# Altium PCB mini.PcbDoc
Units mm, origin at the board's own origin, x right, y up, seen from the top; angles counter-clockwise.
Board outline 35 x 32 mm, 2 copper layers (Top Layer, Bottom Layer); 32 components, 38 nets, 165 pads, 42 vias.
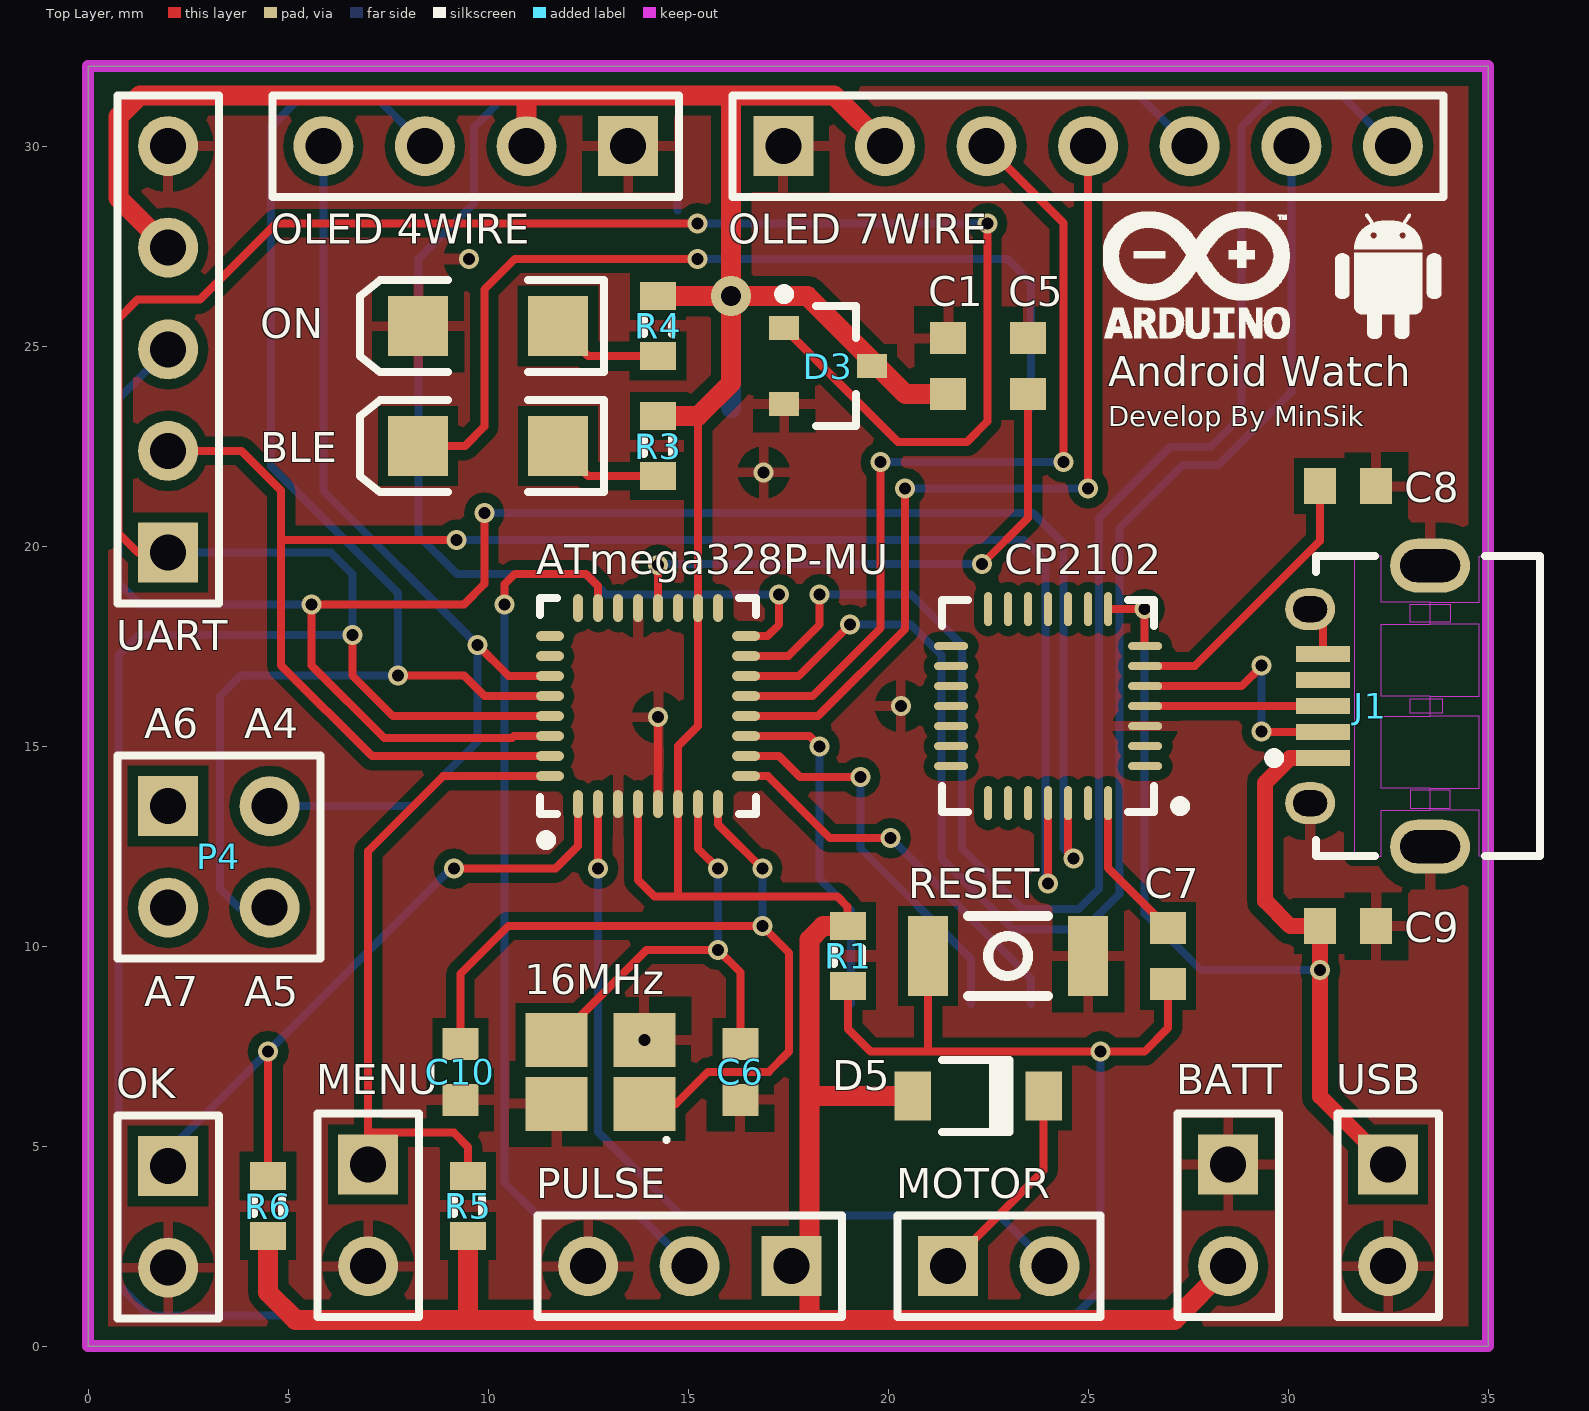
[diagram p0: Top Layer view]
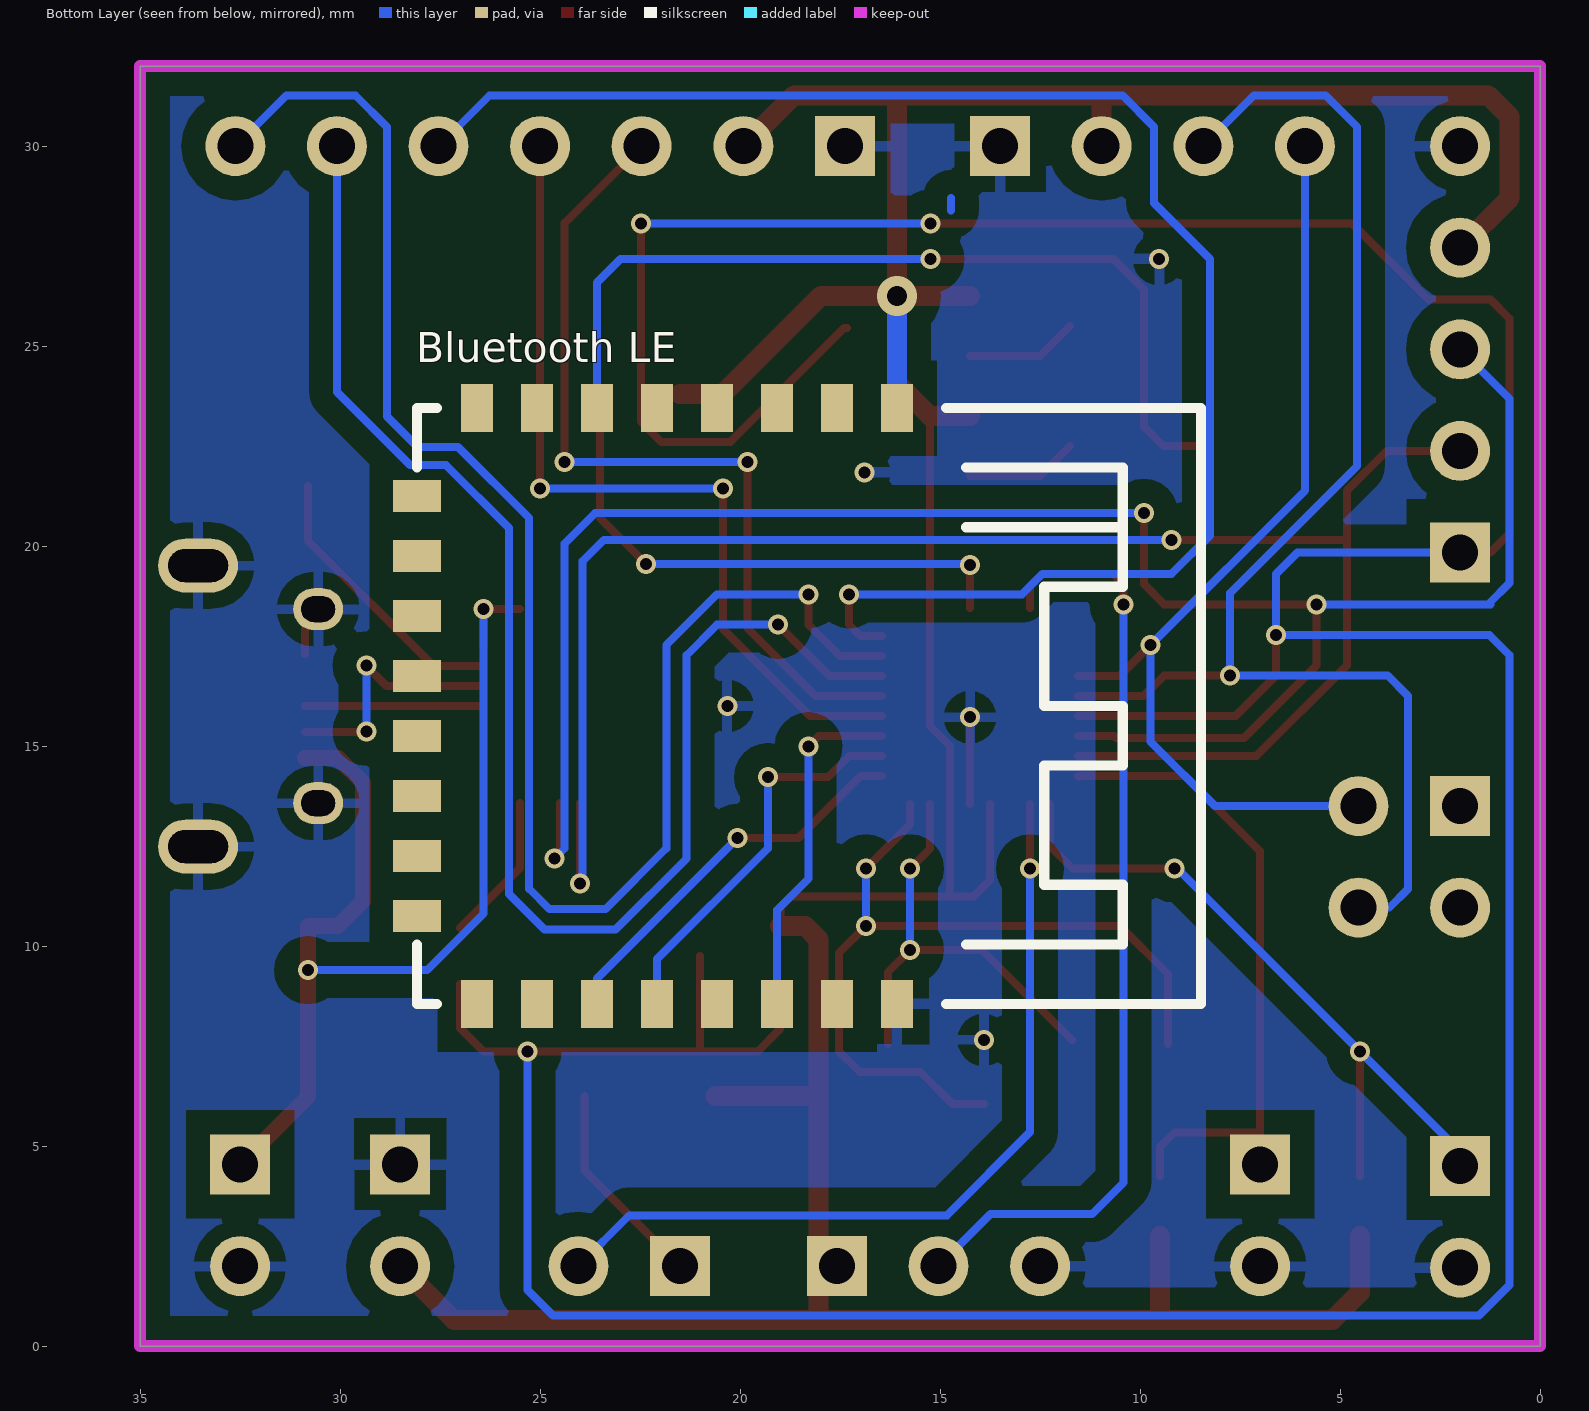
[diagram p1: Bottom Layer view, seen from below]

## Layer stack, top to bottom
Top Solder: solder mask 0.0102, Solder Resist, Dk 3.5
Top Layer: signal copper 0.0356
Dielectric 1: dielectric 0.32, FR-4, Dk 4.8
Bottom Layer: signal copper 0.0356
Bottom Solder: solder mask 0.0102, Solder Resist, Dk 3.5

## Board outline
0,0 35,0 35,32 0,32

## Design rules (kind name [scope] priority, off if disabled: settings)
AssemblyTestPointUsage [All] p1 off:
AssemblyTestpoint [All] p1 off: testpointundercomponent=TRUE minsize=1.016 maxsize=2.54 preferedsize=1.524 minholesize=0 maxholesize=1.016 preferedholesize=0.813 testpointgrid=0.025 usegrid=TRUE gridtolerance=0 allowsidetop=TRUE allowsidebottom=TRUE
Clearance Clearance_5 [InNamedPolygon('Top Layer-GND')] p1: gap=0.254 ignorepadtopadclearanceinfootprint=FALSE except(0: Arc-Hole Track-Hole SMDPad-Hole THPad-Hole Via-Hole Fill-Hole Poly-Hole Region-Hole Text-Hole)
Clearance Clearance_4 [InNamedPolygon('Top Layer-GND')] p2: gap=0.254 ignorepadtopadclearanceinfootprint=FALSE except(0: Arc-Hole Track-Hole SMDPad-Hole THPad-Hole Via-Hole Fill-Hole Poly-Hole Region-Hole Text-Hole)
Clearance Clearance_3 [InNamedPolygon('Bottom Layer-GND')] p3: gap=0.6 ignorepadtopadclearanceinfootprint=FALSE
Clearance Clearance_2 [InNamedPolygon('Top Layer-GND')] p4: gap=0.254 ignorepadtopadclearanceinfootprint=FALSE except(0: Arc-Hole Track-Hole SMDPad-Hole THPad-Hole Via-Hole Fill-Hole Poly-Hole Region-Hole Text-Hole)
Clearance Clearance_1 [InNamedPolygon('Top Layer-GND')] p5: gap=0.254 ignorepadtopadclearanceinfootprint=FALSE
Clearance [All] p6: gap=0.1 ignorepadtopadclearanceinfootprint=FALSE
FabricationTestPointUsage [All] p1 off: valid=0 allowmultiple=FALSE
FabricationTestpoint [All] p1 off: side=3 testpointundercomponent=TRUE minsize=1.016 maxsize=2.54 preferedsize=1.524 minholesize=0 maxholesize=1.016 preferedholesize=0.813 testpointgrid=0.025 allowsidetop=TRUE allowsidebottom=TRUE usegrid=TRUE gridtolerance=0
HoleSize [All] p1: absolutevalues=TRUE maxlimit=2.54 minlimit=0 maxpercent=80.000 minpercent=20.000
MinimumSolderMaskSliver [All] p1: minsoldermaskwidth=0.1
PolygonConnect PolygonConnect_5 [All vs IsNamedPolygon('Top Layer-GND')] p1: connectstyle=Relief reliefconductorwidth=0.254 reliefentries=4 polygonreliefangle="90 Angle" airgapwidth=0.4
PolygonConnect PolygonConnect_4 [All vs IsNamedPolygon('Top Layer-GND')] p2: connectstyle=Relief reliefconductorwidth=0.254 reliefentries=4 polygonreliefangle="90 Angle" airgapwidth=0.4
PolygonConnect PolygonConnect_3 [All vs IsNamedPolygon('Bottom Layer-GND')] p3: connectstyle=Relief reliefconductorwidth=0.254 reliefentries=4 polygonreliefangle="90 Angle" airgapwidth=0.4
PolygonConnect PolygonConnect_2 [All vs IsNamedPolygon('Top Layer-GND')] p4: connectstyle=Relief reliefconductorwidth=0.254 reliefentries=4 polygonreliefangle="90 Angle" airgapwidth=0.4
PolygonConnect PolygonConnect_1 [All vs IsNamedPolygon('Bottom Layer-GND')] p5: thpad.connectstyle=Relief thpad.reliefconductorwidth=0.254 thpad.reliefentries=4 thpad.polygonreliefangle="90 Angle" thpad.airgapwidth=0.4 smdpad.connectstyle=Relief smdpad.reliefconductorwidth=0.254 smdpad.reliefentries=4 smdpad.polygonreliefangle="90 Angle" smdpad.airgapwidth=0.4 via.connectstyle=Relief via.reliefconductorwidth=0.254 via.reliefentries=4 via.polygonreliefangle="90 Angle" via.airgapwidth=0.254
PolygonConnect [All] p6: connectstyle=Relief reliefconductorwidth=0.254 reliefentries=4 polygonreliefangle="90 Angle" airgapwidth=0.254
RoutingVias [All] p1: holewidth=0.3 width=0.5 viastyle="Through Hole" minholewidth=0.3 minwidth=0.5 maxholewidth=0.5 maxwidth=1
SilkToSolderMaskClearance [IsPad] p1: minsilkscreentomaskgap=0.1 clearancetoexposedcopper=TRUE
SolderMaskExpansion SolderMaskExpansion_ATmega328P-MU [HasFootprint('32M1-A_L')] p1: expansion=0.07
SolderMaskExpansion SolderMaskExpansion_HIRO [HasFootprint('HIRO-ZX62D-B-5P8_V')] p2: expansion=0.07
SolderMaskExpansion SolderMaskExpansion_TSX-3225 [HasFootprint('TSX-3225')] p3: expansion=0.07
SolderMaskExpansion SolderMaskExpansion_CP2102 [HasFootprint('SLAB-QFN-28-3125x3125TP_N')] p4: expansion=0.07
SolderMaskExpansion [All] p5: expansion=0.102
Width Width_5V [InNet('5V')] p1: maxlimit=1 minlimit=0.1 preferedwidth=0.5
Width Width_VBUS [InNet('VBUS')] p2: maxlimit=1 minlimit=0.1 preferedwidth=0.4
Width Width_GND [InNet('VGND')] p3: maxlimit=1 minlimit=0.5 preferedwidth=0.5
Width [All] p4: maxlimit=0.2 minlimit=0.1 preferedwidth=0.2
23 further rules are at their usual default settings.

## Components (designator, comment, footprint, x,y, rotation, side; value= is the part's Value field where it differs from the comment)
16MHz "16MHz" TSX-3225 12.808,6.856 r180 top locked (schematic designator X1)
ATmega328P-MU "ATmega328P-MU" 32M1-A_L 14,16 r90 top (schematic designator U2)
BATT "BATT" HDR1X2 28.5,4.54 r270 top locked (schematic designator P5)
BLE "STATUS" 3.2X1.6X1.1 10,22.5 r180 top locked (schematic designator D2)
"Bluetooth LE" "HM-10" HM-10 18.275,16.002 r180 bottom locked (schematic designator U3)
C1 "Cap" 1608[0603] 21.5,24.5 r270 top value=0.1uF
C5 "Cap" 1608[0603] 23.5,24.5 r270 top value=0.1uF
C6 "Cap" 1608[0603] 16.308,6.856 r90 top value=22pF
C7 "Cap" 1608[0603] 27,9.75 r90 top value=0.1uF
C8 "Cap" 1608[0603] 31.5,21.5 r0 top locked value=0.1uF
C9 "Cap" 1608[0603] 31.5,10.5 r0 top locked value=1uF
C10 "Cap" 1608[0603] 9.308,6.856 r90 top value=22pF
CP2102 "CP2102-GM" SLAB-QFN-28-3125x3125TP_N 24,16 r180 top locked (schematic designator U4)
D3 "BAV70" INF-SOT23_L 18.5,24.5 r0 top
D5 "SOD123" MCC-SOD123_V 22.25,6.25 r0 top locked
J1 "ZX62D-B-5P8" HIRO-ZX62D-B-5P8_V 32.05,16 r90 top locked
MENU "MENU" HDR1X2 7,4.54 r270 top locked (schematic designator P10)
MOTOR "MOTOR" HDR1X2 21.5,2 r0 top locked (schematic designator P9)
OK "OK" HDR1X2 2,4.5 r270 top locked (schematic designator P11)
"OLED 4WIRE" "Header 4" HDR1X4 13.5,30 r180 top (schematic designator P2)
"OLED 7WIRE" "Header 7" HDR1X7 17.38,30 r0 top (schematic designator P1)
ON "POWER" 3.2X1.6X1.1 10,25.5 r180 top locked (schematic designator D4)
P4 "ADC" HDR2X2 2,13.5 r270 top locked
PULSE "Pulsesensor" HDR1X3 17.58,2 r180 top locked (schematic designator P8)
R1 "Res2" J1-0603 19,9.75 r90 top value=10K
R3 "Res2" J1-0603 14.25,22.5 r90 top locked value=1K
R4 "Res2" J1-0603 14.25,25.5 r90 top locked value=1K
R5 "Res2" J1-0603 9.5,3.5 r270 top value=10K
R6 "Res2" J1-0603 4.5,3.5 r270 top value=10K
RESET "RESET" SW 23,9.75 r0 top locked (schematic designator S1)
UART "Header 5" HDR1X5 2,19.84 r90 top locked (schematic designator P3)
USB "USB PW" HDR1X2 32.5,4.54 r270 top locked (schematic designator P7)

## Footprints (in the part's own frame and the unit in brackets; to place one, negate y for a bottom-side part, rotate by r counter-clockwise, add the part's x,y. Pads: shape width x height; smd on the part's side, far side on the other; paste and mask are expansions set on the pad)
3.2X1.6X1.1 [mm] "SMT LED; 2 Flat Leads"
  rect 1.5x1.5 smd: 1(-1.75,0) 2(1.75,0)
  silkscreen extent -2.9,-1.15 3.2,1.15
32M1-A_L [mm] "QFN, 32-Leads, Body 5x5mm, Pitch 0.5mm, Thermal Pad 3.3x3.3mm, IPC High Density"
  oval 0.7x0.25 smd: 1(-2.45,1.75) 2(-2.45,1.25) 3(-2.45,0.75) 4(-2.45,0.25) 5(-2.45,-0.25) 6(-2.45,-0.75) 7(-2.45,-1.25) 8(-2.45,-1.75) 17(2.45,-1.75) 18(2.45,-1.25) 19(2.45,-0.75) 20(2.45,-0.25) 21(2.45,0.25) 22(2.45,0.75) 23(2.45,1.25) 24(2.45,1.75)
  oval 0.25x0.7 smd: 9(-1.75,-2.45) 10(-1.25,-2.45) 11(-0.75,-2.45) 12(-0.25,-2.45) 13(0.25,-2.45) 14(0.75,-2.45) 15(1.25,-2.45) 16(1.75,-2.45) 25(1.75,2.45) 26(1.25,2.45) 27(0.75,2.45) 28(0.25,2.45) 29(-0.25,2.45) 30(-0.75,2.45) 31(-1.25,2.45) 32(-1.75,2.45)
  silkscreen extent -3.47,-2.7 2.7,2.7, body extent -2.55,-2.55 2.55,2.55, height 1
1608[0603] [mm] "Chip Capacitor, Body 1.6x0.8mm, IPC High Density"
  rect 0.8x0.9 smd: 1(-0.7,0) 2(0.7,0)
  body extent -0.88,-0.48 0.88,0.48, height 1.3
HDR1X2 [mm] "Connector; Header; 2 Position"
  rect 1.5x1.5 hole 0.9: 1(0,0)
  round 1.5 hole 0.9: 2(2.54,0)
  silkscreen extent -1.27,-1.27 3.81,1.27
HDR1X3 [mm] "Connector; Header; 3 Position"
  rect 1.5x1.5 hole 0.9: 1(0,0)
  round 1.5 hole 0.9: 2(2.54,0) 3(5.08,0)
  silkscreen extent -1.27,-1.27 6.35,1.27
HDR1X4 [mm] "Connector; Header; 4 Position"
  rect 1.5x1.5 hole 0.9: 1(0,0)
  round 1.5 hole 0.9: 2(2.54,0) 3(5.08,0) 4(7.62,0)
  silkscreen extent -1.27,-1.27 8.89,1.27
HDR1X5 [mm] "Connector; Header; 5 Position"
  rect 1.5x1.5 hole 0.9: 1(0,0)
  round 1.5 hole 0.9: 2(2.54,0) 3(5.08,0) 4(7.62,0) 5(10.16,0)
  silkscreen extent -1.27,-1.27 11.43,1.27
HDR1X7 [mm] "Connector; Header; 7 Position"
  rect 1.5x1.5 hole 0.9: 1(0,0)
  round 1.5 hole 0.9: 2(2.54,0) 3(5.08,0) 4(7.62,0) 5(10.16,0) 6(12.7,0) 7(15.24,0)
  silkscreen extent -1.27,-1.27 16.51,1.27
HDR2X2 [mm] "Connector; Header; 2x2 Position"
  rect 1.5x1.5 hole 0.9: 1(0,0)
  round 1.5 hole 0.9: 2(0,2.54) 3(2.54,0) 4(2.54,2.54)
  silkscreen extent -1.27,-1.27 3.81,3.81
HIRO-ZX62D-B-5P8_V [mm] "Micro-USB Connector, 9-Leads, Body 7.5x5.6mm, Pitch 0.65mm"
  rect 0.4x1.35 smd: 1(-1.3,1.175) 2(-0.65,1.175) 3(0,1.175) 4(0.65,1.175) 5(1.3,1.175)
  oval 1.05x1.25 hole 0.65 slot 0.85 at 90 deg: 6(-2.425,1.5) 7(2.425,1.5)
  oval 1.35x2 hole 0.825 slot 1.5 at 90 deg: 8(-3.512,-1.5) 9(3.512,-1.5)
  Top Layer keep-out region: -2.6,-1.5 -2.05,-1.5 -2.05,-0.275 -0.25,-0.275 -0.25,-1.5 0.25,-1.5 0.25,-0.275 2.05,-0.275 2.05,-1.5 2.6,-1.5 2.6,-0.275 3.75,-0.275 3.75,0.395 -3.75,0.395 -3.75,-0.275 -2.6,-0.275
  Top Layer keep-out region: -3.75,-2.725 -2.6,-2.725 -2.6,-1.5 -2.05,-1.5 -2.05,-2.725 -0.25,-2.725 -0.25,-1.5 0.25,-1.5 0.25,-2.725 2.05,-2.725 2.05,-1.5 2.6,-1.5 2.6,-2.725 3.75,-2.725 3.75,-2.95 -3.75,-2.95
  Top Layer keep-out region: -0.18,-1.8 -0.18,-1 0.18,-1 0.18,-1.8
  Top Layer keep-out region: -2.55,-2 -2.1,-2 -2.1,-1 -2.55,-1
  Top Layer keep-out region: 2.55,-2 2.1,-2 2.1,-1 2.55,-1
  silkscreen extent -3.75,-4.25 3.75,2.52, body extent -4.05,-4.15 4.05,1.65, height 2.75
HM-10 [mm] "Bluetooth Low Energy Module"
  rect 0.8x1.2 smd: 1(2.2,7.45) 2(0.7,7.45) 3(-0.8,7.45) 4(-2.3,7.45) 5(-3.8,7.45) 6(-5.3,7.45) 7(-6.8,7.45) 8(-8.3,7.45) 17(-8.3,-7.45) 18(-6.8,-7.45) 19(-5.3,-7.45) 20(-3.8,-7.45) 21(-2.3,-7.45) 22(-0.8,-7.45) 23(0.7,-7.45) 24(2.2,-7.45)
  rect 1.2x0.8 smd: 9(-9.8,5.25) 10(-9.8,3.75) 11(-9.8,2.25) 12(-9.8,0.75) 13(-9.8,-0.75) 14(-9.8,-2.25) 15(-9.8,-3.75) 16(-9.8,-5.25)
  silkscreen extent -9.8,-7.45 9.8,7.45
INF-SOT23_L [mm] "SOT23, 3-Leads, Body 2.9x1.3 mm, Pitch 0.95 mm, IPC High Density"
  rect 0.75x0.6 smd: 1(-1.1,0.95) 2(-1.1,-0.95) 3(1.1,0)
  silkscreen extent -1.22,-1.5 0.7,1.92, body extent -0.7,-1.5 0.7,1.5, height 1.1
J1-0603 [mm] "Chip Resistor, Body 1.6x0.8mm, IPC High Density"
  rect 0.7x0.9 smd: 1(-0.75,0) 2(0.75,0)
  silkscreen extent -0.2,-0.35 0.2,0.35, body extent -0.85,-0.48 0.85,0.48, height 0.9
MCC-SOD123_V [mil] "SOD123, 2-Leads, Body 2.7x1.6mm, Height 1.35mm"
  rect 35.98x47.99 smd: 1(-64.5,0) 2(64.5,0)
  silkscreen extent -36,-35 31,35, body extent -53,-31 53,31, height 53
SLAB-QFN-28-3125x3125TP_N [mm] "QFN, 28-Leads, Body 5x5mm, Pitch 0.5mm, Thermal Pad 3.13x3.13mm, IPC Medium Density"
  oval 0.85x0.2 smd: 1(-2.425,1.5) 2(-2.425,1) 3(-2.425,0.5) 4(-2.425,0) 5(-2.425,-0.5) 6(-2.425,-1) 7(-2.425,-1.5) 15(2.425,-1.5) 16(2.425,-1) 17(2.425,-0.5) 18(2.425,0) 19(2.425,0.5) 20(2.425,1) 21(2.425,1.5)
  oval 0.2x0.85 smd: 8(-1.5,-2.425) 9(-1,-2.425) 10(-0.5,-2.425) 11(0,-2.425) 12(0.5,-2.425) 13(1,-2.425) 14(1.5,-2.425) 22(1.5,2.425) 23(1,2.425) 24(0.5,2.425) 25(0,2.425) 26(-0.5,2.425) 27(-1,2.425) 28(-1.5,2.425)
  silkscreen extent -3.42,-2.65 2.65,2.65, body extent -2.5,-2.5 2.5,2.5, height 1
SW [mm] "SMD Switch for Arduino Mini"
  rect 1x2 smd: 1(-2,0) 2(2,0)
  silkscreen extent -1,-1 1,1
TSX-3225 [mm] "SMD Type Crystal 3.2mm x 2.5 mm"
  rect 1.55x1.35 smd: 1(-1.1,0.8) 2(-1.1,-0.8) 3(1.1,-0.8) 4(1.1,0.8)
  silkscreen extent -1.7,1.65 -1.6,1.75, body extent -1.65,-1.3 1.65,1.3, height 0.7

## Part data
16MHz: library part XTAL-1-3-4
ATmega328P-MU: library part CMP-0095-00077-2, "8-bit AVR Microcontroller, 32KB Flash, 1KB EEPROM, 2KB SRAM, 32-pin MLF, Industrial Grade (-40∑C to 85∑C)", Code_JEDEC=MO-220-VHHD-2, ComponentLink1Description="Manufacturer URL", ComponentLink1URL=http://www.atmel.com/, ComponentLink2Description="ATmega48A/48PA/88A/88PA/168A/168PA/328/328P Datasheet", ComponentLink2URL=http://www.atmel.com/dyn/resources/prod_documents/8271.pdf, ComponentLink3Description="ATmega48A/48PA/88A/88PA/168A/168PA/328/328P Summary", ComponentLink3URL=http://www.atmel.com/dyn/resources/prod_documents/8271S.pdf, DatasheetVersion="revD, May-2011", PackageDescription="32-Pin Micro Lead Frame Package (MLF),  5 x 5 x 1.0 mm Body, Pitch 0.50 mm, 3.10mm Exposed Pad", PackageReference=32M1-A, PackageVersion="revE, May-2006", RevisionNote="DatasheetVersion updated. URLs added."
BATT MENU MOTOR OK USB: library part "Header 2", "Header, 2-Pin", LatestRevisionDate=17-Jul-2002, LatestRevisionNote="Re-released for DXP Platform.", Publisher="Altium Limited"
BLE ON: library part LED3, "Typical BLUE SiC LED", DatasheetVersion=16-Apr-2002, LatestRevisionDate=17-Dec-2003, LatestRevisionNote="PCB Footprint replaced.", PackageDescription="SM LED; 2 C-Bend Leads; Body 3.5 x 2.8 x 1.9 mm, inc leads (LxWxH typ)", PackageReference=3.5X2.8X1.9, PackageVersion=16-Apr-2002, Published=8-Jun-2000, Publisher="Altium Limited"
"Bluetooth LE": "Bluetooth Low Energy Module [JDY-08]"
C1 C5 C6 C7 C8 C9 C10: "Capacitor", LatestRevisionDate=17-Jul-2002, LatestRevisionNote="Re-released for DXP Platform.", PackageDescription="Radial Cap, Thru-Hole; 2 Leads; 0.3 in Pin Spacing", PackageReference=RAD-0.3, Published=8-Jun-2000, Publisher="Altium Limited"
CP2102: library part CMP-0511-00012-1, "Single-Chip USB to UART Bridge, 1024 Bytes EEPROM, -40 to 85 degC, 28-pin QFN, Tube", Manufacturer="Silicon Labs", Code_IPC=J-STD-020C, Code_JEDEC=MO-220, ComponentLink1Description="Manufacturer URL", ComponentLink1URL=http://www.silabs.com/, ComponentLink2Description=Datasheet, ComponentLink2URL=http://www.silabs.com/Support%20Documents/TechnicalDocs/CP2102-9.pdf, ComponentLink3Description="Package Specification", ComponentLink3URL=http://www.silabs.com/Support%20Documents/TechnicalDocs/C8051T61x.pdf, DatasheetVersion="Rev. 1.5", EEPROM="1024 Bytes", Internal Oscillator=TRUE, Mounting Technology="Surface Mount", PackageDescription="28-Pin Quad-Flat No-Leads Package, Body 5 x 5 mm, Pitch 0.5 mm", PackageReference=QFN-28, PartNumber=CP2102-GM, Sub-Family="USB Bridges"
D3: library part CMP-1176-00013-1, "Silicon Switching Diode, SOT23, Reel, Green", Manufacturer=Infineon, ComponentLink1Description="Manufacturer URL", ComponentLink1URL=http://www.infineon.com/, ComponentLink2Description=Datasheet, ComponentLink2URL=http://www.infineon.com/dgdl/bav70series.pdf?folderId=db3a30431400ef6801141b5844e103ea&fileId=db3a30431400ef6801141c0ba40e041d, ComponentLink3Description="Package Specification", ComponentLink3URL=http://www.infineon.com/dgdl/SOT23-Package_Overview.pdf?folderId=db3a30431936bc4b0119532290053c66&fileId=db3a30431936bc4b0119533468123c85, Configuration=Dual, Green=TRUE, IF (max)=200A?mA, IR (max)=150A?nA, Mounting Technology="Surface Mount", PackageDescription="3-Pin Small Outline Transistor Package, 1.3 x 2.9 mm Body, 0.95 mm Pitch", PackageReference=SOT23, PackageVersion=Apr-08, PartNumber=BAV70, trr (max)=4A?ns, VBR (min)=85A?V, VF (max)=1.25A?V, VR (max)=80A?V
D5: library part CMP-0862-00001-1, "Switching Diode, 500 mW, 100 V, -55 to 150 degC, SOD123, RoHS, Tape and Reel", Manufacturer="Micro Commercial Components", Operating Temperature Range="-55 to 150 degC", PartNumber=1N4448W-TP, Typical Junction Capacitance="4 pF", ComponentLink1Description="Manufacturer URL", ComponentLink1URL=http://www.mccsemi.com/, ComponentLink2Description=Datasheet, ComponentLink2URL=http://www.mccsemi.com/up_pdf/1N4448W(SOD-123).pdf, ComponentLink3Description="Package Specification", ComponentLink3URL=http://www.mccsemi.com/up_pdf/1N4448W(SOD-123).pdf, DatasheetVersion="Rev. C", FV="1 V Max.", IF (AV)="250 mA", IR="25 nA", Mounting Technology="Surface Mount", PackageDescription="2-Pin SOD123, Body 2.7 x 1.6 mm, Height 1.35 mm", PackageReference=SOD123, PackageVersion="Rev. C", Packing="Tape and Reel", PD="500 mW", RoHS=TRUE, Trr="4 nS", VRM (PRV)="100 V"
J1: library part CMP-0029-00002-1, "Right Angle Receptacle Connector, Micro USB, 30 V(AC), -30 to 85 degC, 5-Pin SMD, RoHS, Tape and Reel", Capacitance="1 uF", Case/Package=1206, Case Code (Metric)=3216, Max Operating Temperature=125degC, Min Operating Temperature=-55degC, Package Quantity=2000, Resistance="7.5 Ohm", Tolerance=10%, Voltage Rating="35 V", Case Code (Imperial)=1206, ComponentLink1Description="Manufacturer URL", ComponentLink1URL=https://www.hirose.com, ComponentLink2Description=Datasheet, ComponentLink2URL=https://www.hirose.com/product/en/download_file/key_name/ZX62D-B-5P8/category/Catalog/doc_file_id/31704/?file_category_id=5&item_id=02420034000&is_series=, ComponentLink3Description="Package Specification", ComponentLink3URL=https://www.hirose.com/product/en/download_file/key_name/ZX62D-B-5P8/category/Drawing%20(2D)/doc_file_id/36535/?file_category_id=6&item_id=02420034000&is_series=, DatasheetVersion=Aug-16, ESR="7.5 Ohm", Height="1.8 mm", Length="3.2 mm", Mount="Surface Mount", PackageDescription="USB Connector, 5 Position Surface Mount, Length 8 mm, Height 2.65 mm", PackageReference=ZX62D-B-5P8, Packaging="Tape and Reel", Pins=2, Radiation Hardening=No, REACH SVHC="No SVHC", RoHSCompliant=True, Voltage Rating (DC)="35 V", Weight="0.000571 oz", Width="1.6 mm"
"OLED 4WIRE": "Header, 4-Pin", LatestRevisionDate=17-Jul-2002, LatestRevisionNote="Re-released for DXP Platform.", Publisher="Altium Limited"
"OLED 7WIRE": "Header, 7-Pin", LatestRevisionDate=17-Jul-2002, LatestRevisionNote="Re-released for DXP Platform.", Publisher="Altium Limited"
P4: library part "Header 2X2", "Header, 2-Pin, Dual row", LatestRevisionDate=17-Jul-2002, LatestRevisionNote="Re-released for DXP Platform.", Publisher="Altium Limited"
PULSE: library part "Header 3", "Header, 3-Pin", LatestRevisionDate=17-Jul-2002, LatestRevisionNote="Re-released for DXP Platform.", Publisher="Altium Limited"
R1 R3 R4 R5 R6: "Resistor", LatestRevisionDate=17-Jul-2002, LatestRevisionNote="Re-released for DXP Platform.", PackageDescription="Axial Device, Thru-Hole; 2 Leads; 0.4 in Pin Spacing", PackageReference=AXIAL-0.4, Published=8-Jun-2000, Publisher="Altium Limited"
RESET: library part SW-PB, "Switch", LatestRevisionDate=17-Jul-2002, LatestRevisionNote="Re-released for DXP Platform.", PackageDescription="Switch; 2 Leads", PackageReference=SPST-2, Published=24-Mar-1999, Publisher="Altium Limited"
UART: "Header, 5-Pin", LatestRevisionDate=17-Jul-2002, LatestRevisionNote="Re-released for DXP Platform.", Publisher="Altium Limited"

## Via types
v1: diameter 0.5, hole 0.3, Top Layer to Bottom Layer, 41 vias
v2: diameter 1, hole 0.5, Top Layer to Bottom Layer, 1 vias

## Nets (pads, with @x,y where several pads share a name; then routed paths per layer and width w, separated by ;. In a path a pad name is that pad's centre, name@x,y a point inside that pad or via, vN(x,y) a via of type N, cw(c..) or ccw(c..) an arc to the next point about the centre after c; other vN are vias at no path point)
5V: "Bluetooth LE.1" "OLED 4WIRE.2" "OLED 7WIRE.2" ATmega328P-MU.4 ATmega328P-MU.6 ATmega328P-MU.18 BATT.2 C1.2 D3.3 D5.1 PULSE.1 R1.2 R3.2 R4.2 R5.2 R6.2 UART.4 | length 107.4
  Top Layer w0.2: ATmega328P-MU.4 13.75,11.65 14.161,11.239 14.75,11.239 ; 15.25,23.25 ATmega328P-MU.18 15.25,15.504 14.75,15.004 ATmega328P-MU.6 14.75,11.239 ; R1.2@18.987,10.5 18.987,10.985 18.733,11.239 14.75,11.239
  Top Layer w0.5: UART.4 0.762,28.698 0.762,30.734 1.298,31.27 10.96,31.27 ; R6.2 4.5,1.342 5.188,0.654 9.5,0.654 ; R5.2 9.5,0.654 ; 10.96,30 10.96,31.27 ; R3.2 15.25,23.25 16.077,24.077 v2(16.077,26.25) ; R4.2 v2(16.077,26.25) ; 16.077,31.237 v2(16.077,26.25) ; R1.2 18.987,10.5 18.374,10.5 18.034,10.16 18.034,6.25 ; 19.92,30 18.65,31.27 10.96,31.27 ; D5.1 18.034,6.25 ; C1.2 20.432,23.8 17.982,26.25 v2(16.077,26.25) ; BATT.2 27.154,0.654 18.034,0.654 ; 9.5,0.654 18.034,0.654 ; 18.034,0.654 18.034,1.546 PULSE.1 18.034,2.454 18.034,6.25
  Bottom Layer w0.5: 16.075,23.452 v2(16.077,26.25)
ADC0: ATmega328P-MU.23 PULSE.2 | length 23.6
  Top Layer w0.2: v1(10.414,18.542) 10.414,19.05 10.668,19.304 12.446,19.304 12.75,19 ATmega328P-MU.23
  Bottom Layer w0.2: v1(10.414,18.542) 10.414,4.086 11.198,3.302 13.738,3.302 PULSE.2
ADC1: ATmega328P-MU.24
ADC2: ATmega328P-MU.25
ADC3: ATmega328P-MU.26
ADC4: "OLED 4WIRE.4" ATmega328P-MU.27 P4.2 | length 24.5
  Top Layer w0.2: v1(9.739,17.526) 10.515,16.75 ATmega328P-MU.27
  Bottom Layer w0.2: P4.2 8.128,13.5 9.739,15.111 v1(9.739,17.526) 5.88,21.385 5.88,30
ADC5: "OLED 4WIRE.3" ATmega328P-MU.28 P4.4 | length 34.7
  Top Layer w0.2: v1(7.747,16.764) 9.398,16.764 9.912,16.25 ATmega328P-MU.28
  Bottom Layer w0.2: P4.4 3.772,10.96 3.302,11.43 3.302,16.256 3.81,16.764 v1(7.747,16.764) 7.747,18.831 4.572,22.006 4.572,30.48 5.362,31.27 7.15,31.27 8.42,30
ADC6: ATmega328P-MU.19
ADC7: ATmega328P-MU.22
BT_Rx: "Bluetooth LE.20" ATmega328P-MU.10 | length 9.9
  Top Layer w0.2: ATmega328P-MU.10 17.272,14.75 17.798,14.224 v1(19.304,14.224)
  Bottom Layer w0.2: v1(19.304,14.224) 19.304,12.446 22.075,9.675 22.075,8.552
BT_Tx: "Bluetooth LE.19" ATmega328P-MU.9 | length 9.9
  Top Layer w0.2: ATmega328P-MU.9 16.992,14.25 18.542,12.7 v1(20.066,12.7)
  Bottom Layer w0.2: v1(20.066,12.7) 23.575,9.191 23.575,8.552
CS: "OLED 7WIRE.7" ATmega328P-MU.15 | length 42.1
  Top Layer w0.2: ATmega328P-MU.15 17.504,17.25 18.288,18.034 v1(18.288,18.796)
  Bottom Layer w0.2: v1(18.288,18.796) 20.574,18.796 21.844,17.526 21.844,12.446 23.368,10.922 24.764,10.922 25.273,11.431 25.273,20.701 27.051,22.479 28.067,22.479 28.829,23.241 28.829,30.48 29.619,31.27 31.341,31.27 32.611,30 32.62,30
D0: "OLED 7WIRE.3" ATmega328P-MU.13 | length 21.5
  Top Layer w0.2: ATmega328P-MU.13 18.115,16.25 19.812,17.947 v1(19.812,22.098) ; 22.46,30 24.384,28.076 v1(24.384,22.098)
  Bottom Layer w0.2: v1(19.812,22.098) v1(24.384,22.098)
D1: "OLED 7WIRE.4" ATmega328P-MU.12 | length 21.5
  Top Layer w0.2: ATmega328P-MU.12 18.251,15.75 20.428,17.927 v1(20.428,21.444) ; v1(25,21.444) 25,30
  Bottom Layer w0.2: v1(20.428,21.444) v1(25,21.444)
D+: CP2102.4 J1.3 | length 4.5
  Top Layer w0.2: CP2102.4 J1.3
D-: CP2102.5 J1.2 | length 6.4
  Top Layer w0.2: CP2102.5 28.839,16.5 29.357,17.018 v1(29.337,17.018) ; v1(29.337,15.367) 29.354,15.35 J1.2
  Bottom Layer w0.2: v1(29.337,15.367) v1(29.337,17.018)
D\T\R\: ATmega328P-MU.29 C7.1 D3.1 R1.1 RESET.1 UART.1 | length 119.7
  Top Layer w0.2: UART.1 1.242,19.84 0.762,20.32 0.762,25.686 1.238,26.162 2.794,26.162 4.699,28.067 v1(15.24,28.067) ; v1(6.604,17.78) 6.604,16.764 7.618,15.75 ATmega328P-MU.29 ; D3.1@17.322,25.45 D3.1 20.244,22.606 21.971,22.606 22.479,23.114 v1(22.479,28.067) ; R1.1 19,7.924 19.558,7.366 v1(25.316,7.366) 26.416,7.366 27,7.95 C7.1 ; 21,7.493 RESET.1
  Bottom Layer w0.2: UART.1@2.16,20 UART.1 6.068,19.84 6.604,19.304 v1(6.604,17.78) 1.27,17.78 0.762,17.272 0.762,1.524 1.524,0.762 24.675,0.762 25.316,1.403 v1(25.316,7.366) ; v1@15.327,28.067 v1(22.479,28.067)
DC: "OLED 7WIRE.6" ATmega328P-MU.14 | length 37.4
  Top Layer w0.2: ATmega328P-MU.14 17.766,16.75 v1(19.05,18.034)
  Bottom Layer w0.2: v1(19.05,18.034) 20.574,18.034 21.336,17.272 21.336,12.192 23.114,10.414 24.892,10.414 25.781,11.303 25.781,20.453 27.357,22.029 28.253,22.029 30.08,23.856 30.08,30
GND: 16MHz.2 16MHz.4 "Bluetooth LE.24" "OLED 4WIRE.1" "OLED 7WIRE.1" ATmega328P-MU.3 ATmega328P-MU.5 ATmega328P-MU.21 BATT.1 C1.1 C5.1 C6.1 C8.2 C9.2 C10.1 CP2102.3 D3.2 J1.5 J1.6 J1.7 J1.8 J1.9 MENU.2 OK.2 ON.2 PULSE.3 RESET.2 UART.5 USB.2 | length 3.4
  Top Layer w0.2: ATmega328P-MU.5 v1(14.25,15.722) ; J1.7@30.607,18.415 30.875,18.147 J1.5
  Bottom Layer w0.2: v1@14.224,15.748 v1(14.25,15.722)
  other v1: 13.908,7.656 20.32,16.002 16.891,21.844 9.525,27.178
ID: J1.4
IO2: ATmega328P-MU.32 MENU.1 R5.1 | length 16.6
  Top Layer w0.2: MENU.1 7,5.334 ; R5.1 9.5,4.978 9.144,5.334 7,5.334 ; ATmega328P-MU.32@11.524,14.224 ATmega328P-MU.32 8.878,14.25 7,12.372 7,5.334
IO3: ATmega328P-MU.1 OK.1 R6.1 | length 17.9
  Top Layer w0.2: R6.1 v1(4.5,7.366) ; v1(9.144,11.938) 11.684,11.938 12.25,12.504 ATmega328P-MU.1
  Bottom Layer w0.2: OK.1 2,4.866 v1(4.5,7.366) 9.072,11.938 v1(9.144,11.938)
IO4: ATmega328P-MU.2 MOTOR.2 | length 20.9
  Top Layer w0.2: v1(12.75,11.938) ATmega328P-MU.2
  Bottom Layer w0.2: v1(12.75,11.938) 12.75,5.35 14.83,3.27 22.77,3.27 MOTOR.2
IO7: "Bluetooth LE.22" ATmega328P-MU.11 | length 8.7
  Top Layer w0.2: ATmega328P-MU.11 18.034,15.25 v1(18.288,14.996)
  Bottom Layer w0.2: v1(18.288,14.996) 18.288,11.684 19.075,10.897 19.075,8.552
IO12: "OLED 7WIRE.5" ATmega328P-MU.16 | length 40.9
  Top Layer w0.2: ATmega328P-MU.16 16.988,17.75 17.272,18.034 v1(17.272,18.796)
  Bottom Layer w0.2: v1(17.272,18.796) 12.954,18.796 12.446,19.304 9.219,19.304 8.255,20.268 8.255,27.178 9.652,28.575 9.652,30.48 10.442,31.27 26.261,31.27 27.559,29.972
NetC5_2: ATmega328P-MU.20 C5.2 | length 13.9
  Top Layer w0.2: ATmega328P-MU.20 v1(14.25,19.532) ; v1(22.352,19.558) 23.5,20.706 C5.2
  Bottom Layer w0.2: v1(14.25,19.532) 14.276,19.558 v1(22.352,19.558)
NetC6_2: 16MHz.3 ATmega328P-MU.7 C6.2 | length 11.4
  Top Layer w0.2: 16MHz.3 13.958,9.906 v1(15.748,9.906) 16.308,9.346 C6.2 ; ATmega328P-MU.7 15.25,12.436 v1(15.748,11.938)
  Bottom Layer w0.2: v1(15.748,9.906) v1(15.748,11.938)
NetC7_2: C7.2 CP2102.28 | length 3.7
  Top Layer w0.2: CP2102.28 25.5,11.95 C7.2
NetC8_1: C8.1 CP2102.6 | length 7
  Top Layer w0.2: CP2102.6 27.668,17 30.8,20.132 C8.1
NetC10_2: 16MHz.1 ATmega328P-MU.8 C10.2 | length 20.9
  Top Layer w0.2: C10.2 9.308,9.308 10.504,10.504 v1(16.854,10.504) 17.526,9.832 17.526,7.366 17.018,6.858 15.494,6.858 14.692,6.056 16MHz.1 ; ATmega328P-MU.8 15.75,13.042 v1(16.854,11.938)
  Bottom Layer w0.2: v1(16.854,10.504) v1(16.854,11.938)
NetD2_1: BLE.1 R3.1 | length 2.8
  Top Layer w0.2: BLE.1 12.5,21.75 R3.1
NetD2_2: "Bluetooth LE.6" BLE.2 | length 22.7
  Top Layer w0.2: BLE.2 9.419,22.5 9.906,22.987 9.906,26.416 10.668,27.178 v1(15.24,27.178)
  Bottom Layer w0.2: v1(15.24,27.178) 22.987,27.178 23.575,26.59 23.575,23.452
NetD4_1: ON.1 R4.1 | length 2.8
  Top Layer w0.2: ON.1 12.5,24.75 R4.1
NetD5_2: D5.2 MOTOR.1 | length 5.2
  Top Layer w0.2: MOTOR.1 23.888,4.388 D5.2
RX: ATmega328P-MU.30 CP2102.26 UART.3 | length 50.2
  Top Layer w0.2: v1(9.906,20.828) 9.906,19.05 9.398,18.542 v1(5.588,18.542) 5.588,17.018 7.406,15.2 10.601,15.2 10.651,15.25 ATmega328P-MU.30 ; CP2102.26 24.5,12.33 v1(24.638,12.192)
  Bottom Layer w0.2: UART.3 0.762,23.682 0.762,19.078 1.27,18.57 1.242,18.542 v1(5.588,18.542) ; v1(9.906,20.828) 23.622,20.828 24.384,20.066 24.384,12.446 v1(24.638,12.192)
SCK: ATmega328P-MU.17
TX: ATmega328P-MU.31 CP2102.25 UART.2 | length 44.8
  Top Layer w0.2: UART.2 3.833,22.38 4.826,21.387 4.826,17.018 7.094,14.75 ATmega328P-MU.31 ; 4.918,20.158 v1(9.214,20.158) ; v1(24,11.56) CP2102.25
  Bottom Layer w0.2: UART.2 UART.2@2.12,22.5 ; v1(9.214,20.158) 23.402,20.158 23.934,19.626 23.934,11.626 v1(24,11.56)
VBUS: C9.1 CP2102.7 CP2102.8 J1.1 USB.1 | length 27.4
  Top Layer w0.2: CP2102.8 v1(26.416,18.425) CP2102.7@26.416,17.5
  Top Layer w0.4: J1.1 30.047,14.7 29.425,14.078 29.425,11.129 30.054,10.5 C9.1 v1(30.8,9.398) 30.8,6.24 USB.1
  Bottom Layer w0.2: v1(26.416,18.425) 26.416,10.809 27.827,9.398 v1(30.8,9.398)
pads on no net: "Bluetooth LE.2" "Bluetooth LE.3" "Bluetooth LE.4" "Bluetooth LE.5" "Bluetooth LE.7" "Bluetooth LE.8" "Bluetooth LE.9" "Bluetooth LE.10" "Bluetooth LE.11" "Bluetooth LE.12" "Bluetooth LE.13" "Bluetooth LE.14" "Bluetooth LE.15" "Bluetooth LE.16" "Bluetooth LE.17" "Bluetooth LE.18" "Bluetooth LE.21" "Bluetooth LE.23" CP2102.1 CP2102.2 CP2102.9 CP2102.10 CP2102.11 CP2102.12 CP2102.13 CP2102.14 CP2102.15 CP2102.16 CP2102.17 CP2102.18 CP2102.19 CP2102.20 CP2102.21 CP2102.22 CP2102.23 CP2102.24 CP2102.27 P4.1 P4.3
copper on no net: | length 0.3
  Bottom Layer w0.2: 14.732,28.386 14.732,28.702

## Polygon pours and split planes (outlines as drawn)
GND on Top Layer "Top Layer-GND" (solid, remove dead copper, pour order 0): 0.5,0.5 34.5,0.5 34.5,31.5 0.5,31.5
GND on Bottom Layer "Bottom Layer-GND" (solid, remove dead copper, pour order 2): 0.5,0.5 34.5,0.5 34.5,31.5 0.5,31.5

## Keep-outs
Keep-Out Layer:
  the board outline again, w0.3

## Silkscreen, mask and mechanical layers (free items; w line width, h text height)
Top Overlay:
  drawing of 4420 lines, arcs and shapes, not listed
  text "Android Watch" at 25.5,24 h0.75
  text "Develop By MinSik" at 25.5,23 h0.5
Drill Drawing:
  text ".LEGEND" at 40.08,5.08 h1.52
  text "Drill Drawing." at 40.08,2.54 h1.52

## Dimensions
0,0 to 35,0 on Mechanical 1
0,0 to 0,32 on Mechanical 1

## Text inside footprints (layer, text, board x,y; h text height)
J1: Mechanical 1 "Board Edge" at 35.455,14.433 h0.3 r90
P4: Top Overlay "A7" at 1.4,8.5 h0.75; Top Overlay "A5" at 3.9,8.5 h0.75; Top Overlay "A4" at 3.9,15.2 h0.75; Top Overlay "A6" at 1.4,15.2 h0.75